# Altium PCB EthernetSwitchBoard.PcbDoc (part 1 of 2)
Units mil, origin at the board's own origin, x right, y up, seen from the top; angles counter-clockwise.
Board outline 5250 x 2500 mil, 4 copper layers (Top Layer, Ground Plane, Power Plane, Bottom Layer), stack 30.634 mil thick; 145 components, 168 nets, 574 pads, 171 vias.
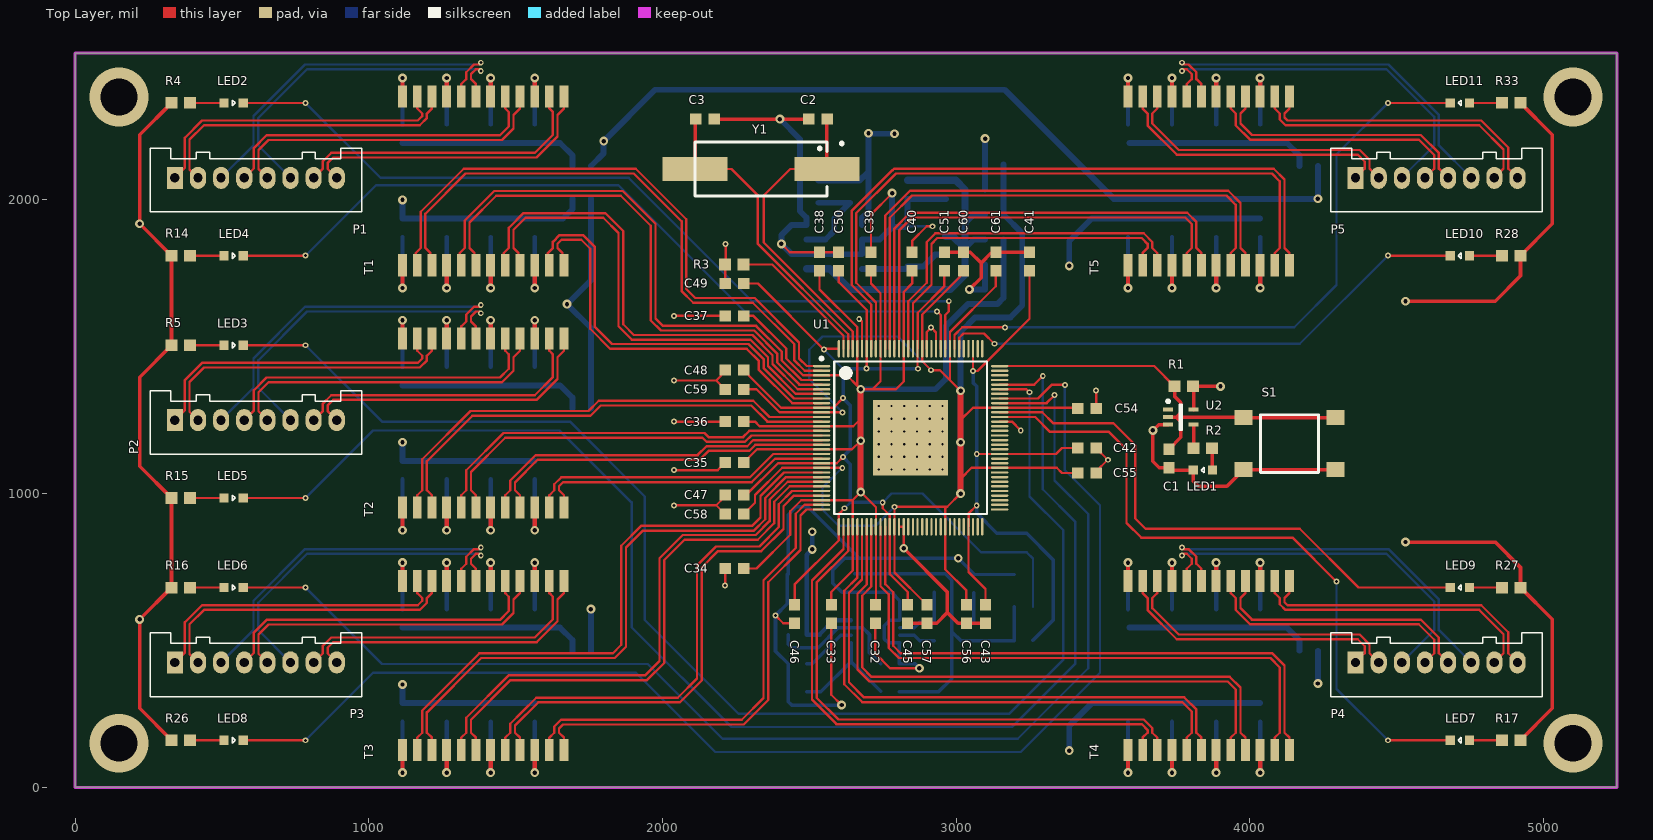
[diagram p0: Top Layer view]
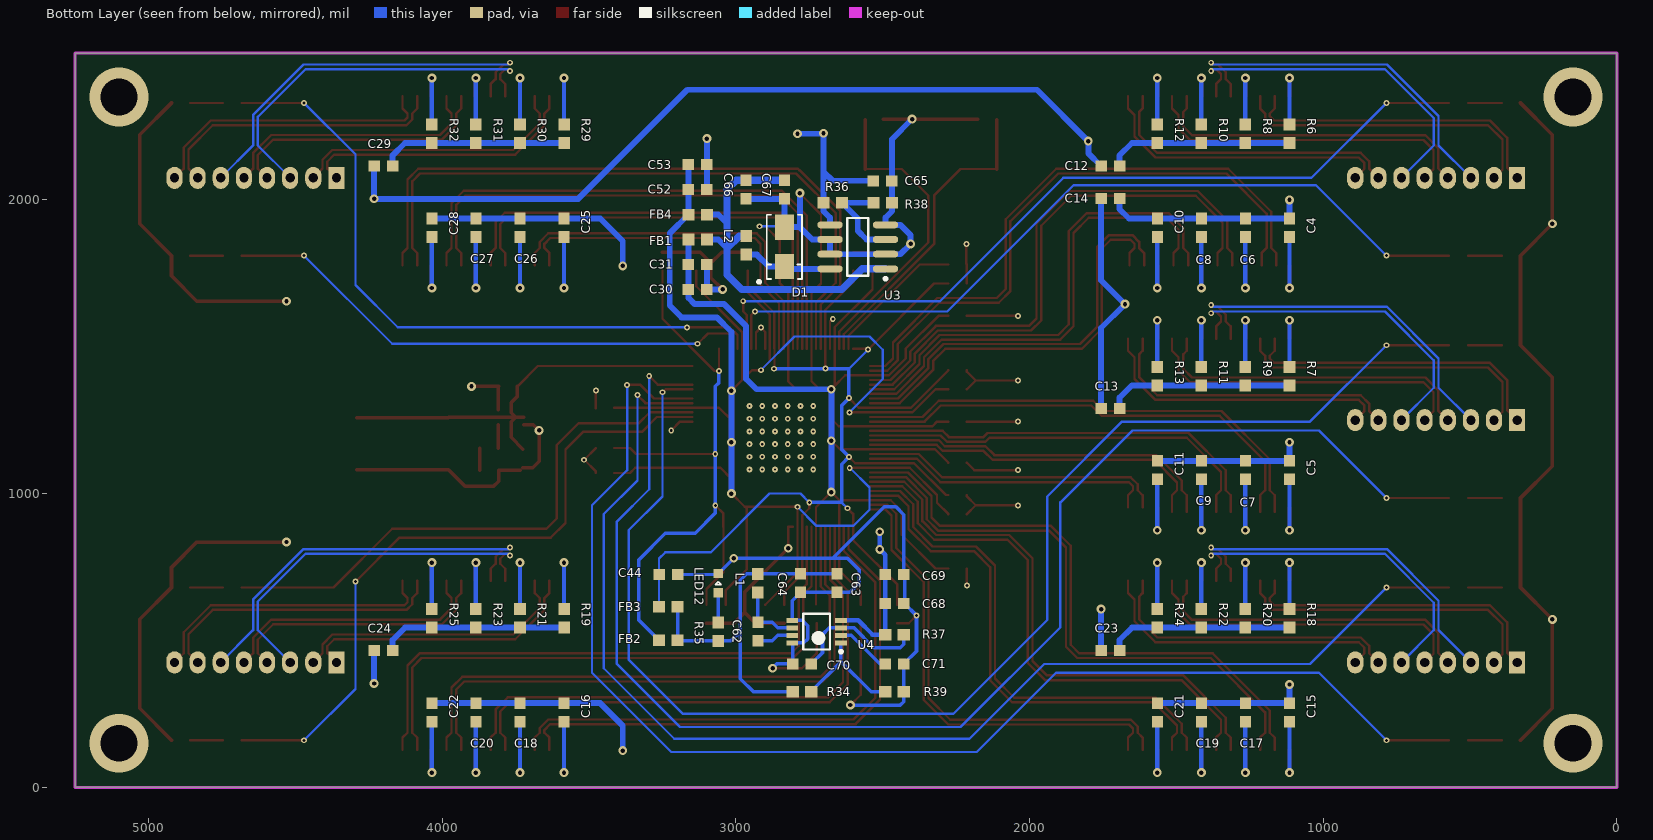
[diagram p1: Bottom Layer view, seen from below]
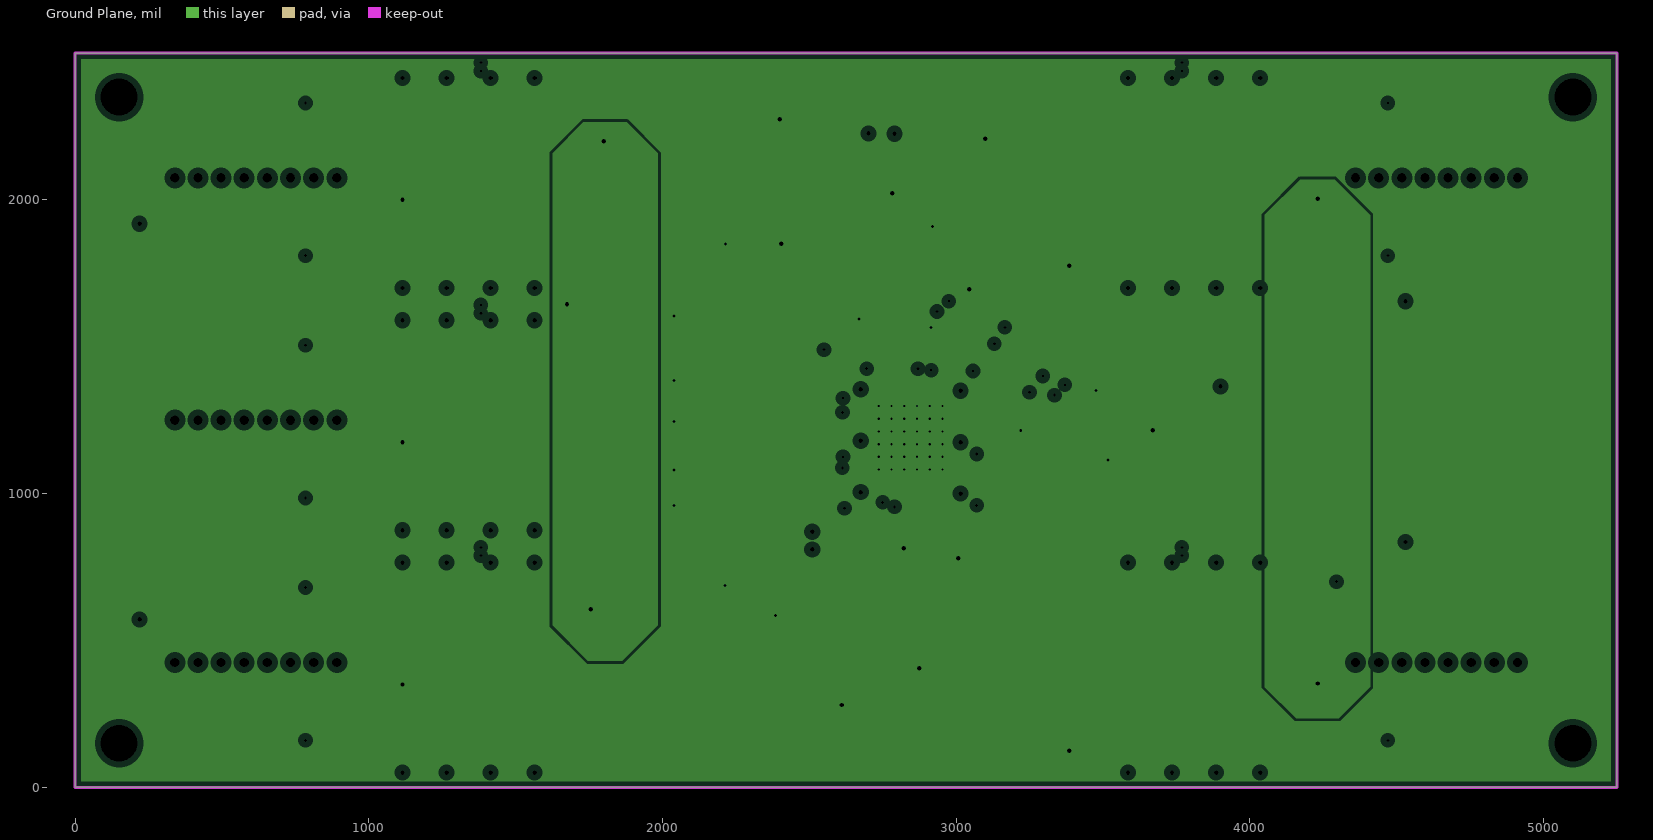
[diagram p2: Ground Plane, clearances drawn from the general rule]
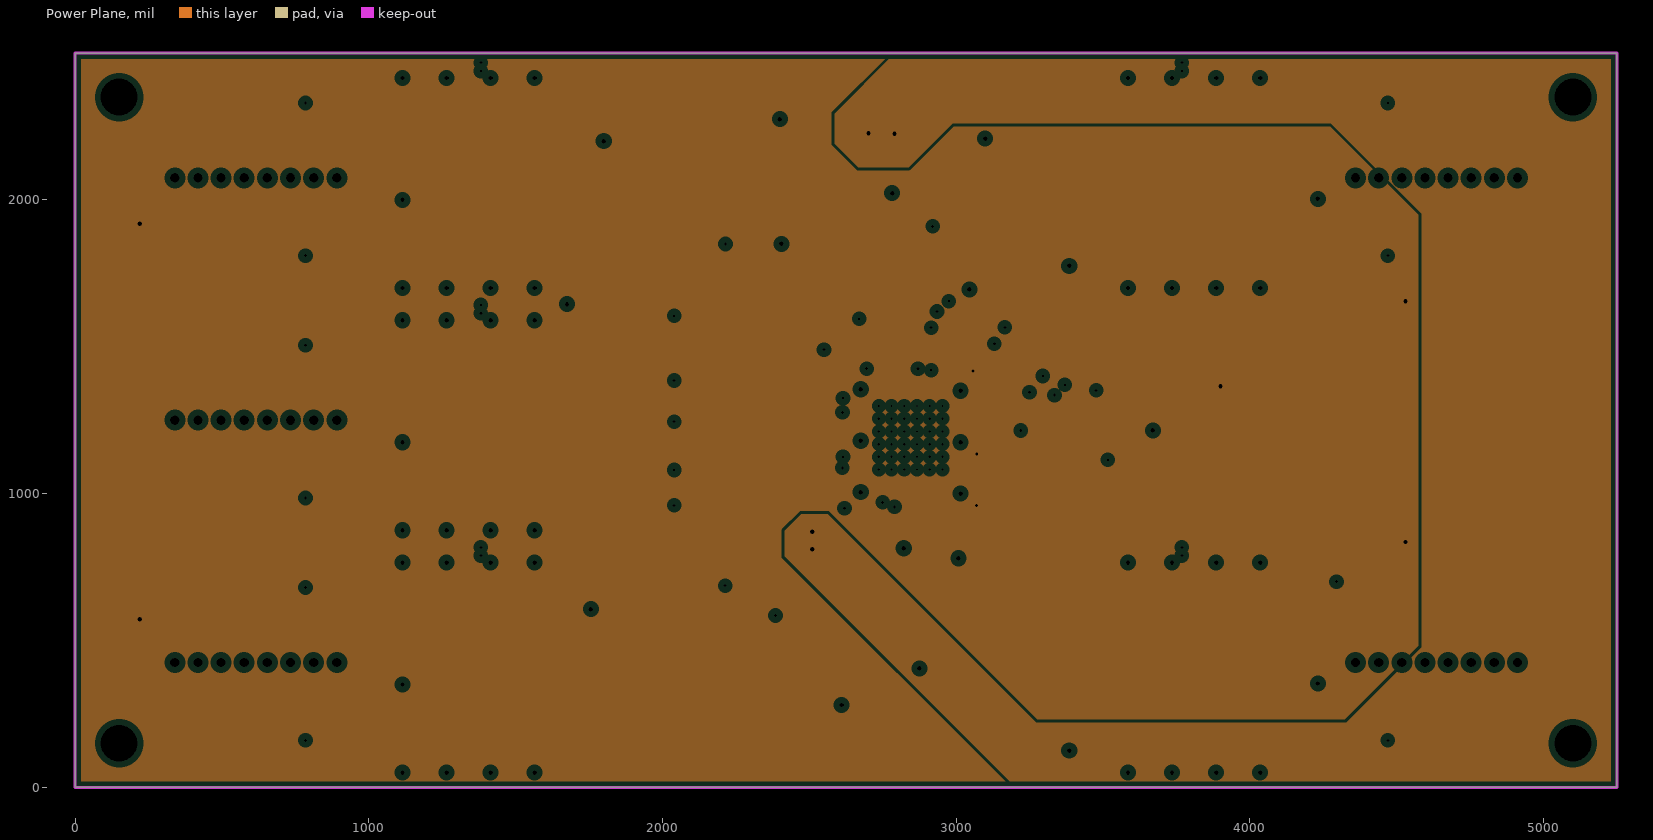
[diagram p3: Power Plane, clearances drawn from the general rule]

## Layer stack, top to bottom
Top Solder: solder mask 0.4, Solder Resist, Dk 3.5
Top Layer: signal copper 1.4
Dielectric 1: core 10, FR-4, Dk 4.2
Ground Plane: plane copper 1.417, net (Multiple Nets)
Dielectric 3: prepreg 5, Dk 4.2
Power Plane: plane copper 1.417, net VDDIO 2V5
Dielectric 2: core 10, Dk 4.2
Bottom Layer: signal copper 1.4
Bottom Solder: solder mask 0.4, Solder Resist, Dk 3.5

## Board outline
0,0 0,2500 5250,2500 5250,0

## Design rules (kind name [scope] priority, off if disabled: settings)
Clearance [All] p1: gap=7
DiffPairsRouting [All] p1: maxlimit=10 minlimit=8 mostfreqgap=8 toplayer_minwidth=8 toplayer_maxwidth=15 toplayer_prefwidth=8 bottomlayer_minwidth=8 bottomlayer_maxwidth=15 bottomlayer_prefwidth=8 maxuncoupledlength=500
HoleSize [All] p1: absolutevalues=TRUE maxlimit=150 minlimit=1 maxpercent=80.000 minpercent=20.000
PlaneClearance GNDPadPlaneClearance [InComponent('U1')] p1: clearance=10
PlaneClearance [All] p2: clearance=20
PlaneConnect GNDPadPlaneConnect [InComponent('U1')] p1: planeconnectstyle=Relief reliefexpansion=8 reliefentries=4 reliefconductorwidth=10 reliefairgap=8
PlaneConnect [All] p2: planeconnectstyle=Relief reliefexpansion=20 reliefentries=4 reliefconductorwidth=10 reliefairgap=10
PolygonConnect [All] p1: connectstyle=Relief reliefconductorwidth=10 reliefentries=4 polygonreliefangle="90 Angle" airgapwidth=10
RoutingVias [All] p1: holewidth=10 width=20 viastyle="Through Hole" minholewidth=10 minwidth=20 maxholewidth=28 maxwidth=50
SolderMaskExpansion [All] p1: expansion=4
Width [All] p1: maxlimit=30 minlimit=7 preferedwidth=10
26 further rules are at their usual default settings.

## Classes and differential pairs
component class SwitchPower: C30 C31 C32 C33 C34 C35 C36 C37 C38 C39 C40 C41 C42 C43 C44 C45 C46 C47 C48 C49 C50 C51 C52 C53 C54 C55 C56 C57 C58 C59 C60 C61 C62 C63 C64 C65 C66 C67 C68 C69 C70 C71 D1 FB1 FB2 FB3 FB4 L1 L2 LED12 R34 R35 R36 R37 R38 R39 U3 U4
component class SwitchConnectors: C4 C5 C6 C7 C8 C9 C10 C11 C12 C13 C14 C15 C16 C17 C18 C19 C20 C21 C22 C23 C24 C25 C26 C27 C28 C29 LED2 LED3 LED4 LED5 LED6 LED7 LED8 LED9 LED10 LED11 P1 P2 P3 P4 P5 R4 R5 R6 R7 R8 R9 R10 R11 R12 R13 R14 R15 R16 R17 R18 R19 R20 R21 R22 R23 R24 R25 R26 R27 R28 R29 R30 R31 R32 R33 T1 T2 T3 T4 T5
component class EthernetSwitchBoard: C1 C2 C3 LED1 R1 R2 R3 S1 U1 U2 Y1
differential pair 5O: +5O_P -5O_N
differential pair 5G: +5G_P -5G_N
differential pair 5B: +5B_P -5B_N
differential pair 5BR: +5BR_P -5BR_N
differential pair 4O: +4O_P -4O_N
differential pair 4G: +4G_P -4G_N
differential pair 4B: +4B_P -4B_N
differential pair 4BR: +4BR_P -4BR_N
differential pair 3O: +3O_P -3O_N
differential pair 3G: +3G_P -3G_N
differential pair 3B: +3B_P -3B_N
differential pair 3BR: +3BR_P -3BR_N
differential pair 2O: +2O_P -2O_N
differential pair 2G: +2G_P -2G_N
differential pair 2B: +2B_P -2B_N
differential pair 2BR: +2BR_P -2BR_N
differential pair 1O: +1O_P -1O_N
differential pair 1G: +1G_P -1G_N
differential pair 1B: +1B_P -1B_N
differential pair 1BR: +1BR_P -1BR_N
differential pair P1_TXRXA: +P1_TXRXA_P -P1_TXRXA_N
differential pair P1_TXRXB: +P1_TXRXB_P -P1_TXRXB_N
differential pair P1_TXRXC: +P1_TXRXC_P -P1_TXRXC_N
differential pair P1_TXRXD: +P1_TXRXD_P -P1_TXRXD_N
differential pair P2_TXRXA: +P2_TXRXA_P -P2_TXRXA_N
differential pair P2_TXRXB: +P2_TXRXB_P -P2_TXRXB_N
differential pair P2_TXRXC: +P2_TXRXC_P -P2_TXRXC_N
differential pair P2_TXRXD: +P2_TXRXD_P -P2_TXRXD_N
differential pair P3_TXRXA: +P3_TXRXA_P -P3_TXRXA_N
differential pair P3_TXRXB: +P3_TXRXB_P -P3_TXRXB_N
differential pair P3_TXRXC: +P3_TXRXC_P -P3_TXRXC_N
differential pair P3_TXRXD: +P3_TXRXD_P -P3_TXRXD_N
differential pair P4_TXRXA: +P4_TXRXA_P -P4_TXRXA_N
differential pair P4_TXRXB: +P4_TXRXB_P -P4_TXRXB_N
differential pair P4_TXRXC: +P4_TXRXC_P -P4_TXRXC_N
differential pair P4_TXRXD: +P4_TXRXD_P -P4_TXRXD_N
differential pair P5_TXRXA: +P5_TXRXA_P -P5_TXRXA_N
differential pair P5_TXRXB: +P5_TXRXB_P -P5_TXRXB_N
differential pair P5_TXRXC: +P5_TXRXC_P -P5_TXRXC_N
differential pair P5_TXRXD: +P5_TXRXD_P -P5_TXRXD_N

## Components (designator, comment, footprint, x,y, rotation, side; value= is the part's Value field where it differs from the comment)
C1 "Cap" CAPC0603 3725,1120 r270 top
C2 "Cap" CAPC0603 2530,2275 r180 top
C3 "Cap" CAPC0603 2145,2275 r0 top
C4 "Cap" CAPC0603 1115,1905 r270 bottom
C5 "Cap" CAPC0603 1115,1080 r270 bottom
C6 "Cap" CAPC0603 1265,1905 r270 bottom
C7 "Cap" CAPC0603 1265,1080 r270 bottom
C8 "Cap" CAPC0603 1415,1905 r270 bottom
C9 "Cap" CAPC0603 1415,1080 r270 bottom
C10 "Cap" CAPC0603 1565,1905 r270 bottom
C11 "Cap" CAPC0603 1565,1080 r270 bottom
C12 "Cap" CAPC0603 1725,2115 r180 bottom
C13 "Cap" CAPC0603 1725,1290 r180 bottom
C14 "Cap" CAPC0603 1725,2005 r0 bottom
C15 "Cap" CAPC0603 1115,255 r270 bottom
C16 "Cap" CAPC0603 3585,255 r270 bottom
C17 "Cap" CAPC0603 1265,255 r270 bottom
C18 "Cap" CAPC0603 3735,255 r270 bottom
C19 "Cap" CAPC0603 1415,255 r270 bottom
C20 "Cap" CAPC0603 3885,255 r270 bottom
C21 "Cap" CAPC0603 1565,255 r270 bottom
C22 "Cap" CAPC0603 4035,255 r270 bottom
C23 "Cap" CAPC0603 1725,465 r180 bottom
C24 "Cap" CAPC0603 4200,465 r180 bottom
C25 "Cap" CAPC0603 3585,1905 r270 bottom
C26 "Cap" CAPC0603 3735,1905 r270 bottom
C27 "Cap" CAPC0603 3885,1905 r270 bottom
C28 "Cap" CAPC0603 4035,1905 r270 bottom
C29 "Cap" CAPC0603 4200,2115 r180 bottom
C30 "Cap" CAPC0603 3130,1695 r180 bottom
C31 "Cap" CAPC0603 3130,1780 r180 bottom
C32 "Cap" CAPC0603 2725,590 r270 top
C33 "Cap" CAPC0603 2575,590 r270 top
C34 "Cap" CAPC0603 2245,745 r180 top
C35 "Cap" CAPC0603 2245,1105 r180 top
C36 "Cap" CAPC0603 2245,1245 r180 top
C37 "Cap" CAPC0603 2245,1605 r180 top
C38 "Cap" CAPC0603 2535,1790 r90 top
C39 "Cap" CAPC0603 2710,1790 r90 top
C40 "Cap" CAPC0603 2850,1790 r90 top
C41 "Cap" CAPC0603 3250,1790 r90 top
C42 "Cap" CAPC0603 3445,1155 r0 top
C43 "Cap" CAPC0603 3100,590 r270 top
C44 "Cap" CAPC0603 3230,725 r180 bottom
C45 "Cap" CAPC0603 2835,590 r270 top
C46 "Cap" CAPC0603 2450,590 r270 top
C47 "Cap" CAPC0603 2245,995 r180 top
C48 "Cap" CAPC0603 2245,1420 r180 top
C49 "Cap" CAPC0603 2245,1715 r180 top
C50 "Cap" CAPC0603 2600,1790 r90 top
C51 "Cap" CAPC0603 2960,1790 r90 top
C52 "Cap" CAPC0603 3130,2035 r180 bottom
C53 "Cap" CAPC0603 3130,2120 r180 bottom
C54 "Cap" CAPC0603 3445,1290 r0 top
C55 "Cap" CAPC0603 3445,1070 r0 top
C56 "Cap" CAPC0603 3035,590 r270 top
C57 "Cap" CAPC0603 2900,590 r270 top
C58 "Cap" CAPC0603 2245,930 r180 top
C59 "Cap" CAPC0603 2245,1355 r180 top
C60 "Cap" CAPC0603 3025,1790 r90 top
C61 "Cap" CAPC0603 3135,1790 r90 top
C62 "Cap" CAPC0603 2925,530 r90 bottom
C63 "Cap" CAPC0603 2655,695 r270 bottom
C64 "Cap" CAPC0603 2780,695 r270 bottom
C65 "Cap" CAPC0603 2500,2065 r180 bottom
C66 "Cap" CAPC0603 2965,2035 r270 bottom
C67 "Cap" CAPC0603 2835,2035 r270 bottom
C68 "Cap" CAPC0603 2460,625 r180 bottom
C69 "Cap" CAPC0603 2460,725 r180 bottom
C70 "Cap" CAPC0603 2775,420 r0 bottom
C71 "Cap" CAPC0603 2460,420 r180 bottom
D1 "Zener" SMASeries 2835,1840 r90 bottom
FB1 "FBead" RES0603 3130,1865 r0 bottom
FB2 "FBead" RES0603 3230,500 r180 bottom
FB3 "FBead" RES0603 3230,615 r0 bottom
FB4 "FBead" RES0603 3130,1950 r0 bottom
L1 "Inductor" RES0603 2925,695 r90 bottom
L2 "Inductor" RES0603 2965,1845 r90 bottom
LED1 "LED" LED0603 3840,1080 r180 top
LED2 "LED" LED0603 540,2330 r0 top
LED3 "LED" LED0603 540,1505 r0 top
LED4 "LED" LED0603 540,1810 r0 top
LED5 "LED" LED0603 540,985 r0 top
LED6 "LED" LED0603 540,680 r0 top
LED7 "LED" LED0603 4715,160 r180 top
LED8 "LED" LED0603 540,160 r0 top
LED9 "LED" LED0603 4715,680 r180 top
LED10 "LED" LED0603 4715,1810 r180 top
LED11 "LED" LED0603 4715,2330 r180 top
LED12 "LED" LED0603 3060,695 r90 bottom
P1 "MOLEX-HDR-1x8-SHERLOCK_VERT" MOLEX-HDR-1X8-SHERLOCK-VERT 340,2075 r180 top
P2 "MOLEX-HDR-1x8-SHERLOCK_VERT" MOLEX-HDR-1X8-SHERLOCK-VERT 340,1250 r180 top
P3 "MOLEX-HDR-1x8-SHERLOCK_VERT" MOLEX-HDR-1X8-SHERLOCK-VERT 340,425 r180 top
P4 "MOLEX-HDR-1x8-SHERLOCK_VERT" MOLEX-HDR-1X8-SHERLOCK-VERT 4360,425 r180 top
P5 "MOLEX-HDR-1x8-SHERLOCK_VERT" MOLEX-HDR-1X8-SHERLOCK-VERT 4360,2075 r180 top
R1 "Res" RES0603 3775,1365 r0 top
R2 "Res" RES0603 3840,1155 r0 top
R3 "Res" RES0603 2245,1780 r0 top
R4 "Res" RES0603 360,2330 r0 top
R5 "Res" RES0603 360,1505 r0 top
R6 "Res" RES0603 1115,2225 r270 bottom
R7 "Res" RES0603 1115,1400 r270 bottom
R8 "Res" RES0603 1265,2225 r270 bottom
R9 "Res" RES0603 1265,1400 r270 bottom
R10 "Res" RES0603 1415,2225 r270 bottom
R11 "Res" RES0603 1415,1400 r270 bottom
R12 "Res" RES0603 1565,2225 r270 bottom
R13 "Res" RES0603 1565,1400 r270 bottom
R14 "Res" RES0603 360,1810 r0 top
R15 "Res" RES0603 360,985 r0 top
R16 "Res" RES0603 360,680 r0 top
R17 "Res" RES0603 4890,160 r180 top
R18 "Res" RES0603 1115,575 r270 bottom
R19 "Res" RES0603 3585,575 r270 bottom
R20 "Res" RES0603 1265,575 r270 bottom
R21 "Res" RES0603 3735,575 r270 bottom
R22 "Res" RES0603 1415,575 r270 bottom
R23 "Res" RES0603 3885,575 r270 bottom
R24 "Res" RES0603 1565,575 r270 bottom
R25 "Res" RES0603 4035,575 r270 bottom
R26 "Res" RES0603 360,160 r0 top
R27 "Res" RES0603 4890,680 r180 top
R28 "Res" RES0603 4890,1810 r180 top
R29 "Res" RES0603 3585,2225 r270 bottom
R30 "Res" RES0603 3735,2225 r270 bottom
R31 "Res" RES0603 3885,2225 r270 bottom
R32 "Res" RES0603 4035,2225 r270 bottom
R33 "Res" RES0603 4890,2330 r180 top
R34 "Res" RES0603 2775,325 r0 bottom
R35 "Res" RES0603 3060,530 r90 bottom
R36 "Res" RES0603 2670,1990 r0 bottom
R37 "Res" RES0603 2460,520 r0 bottom
R38 "Res" RES0603 2500,1990 r0 bottom
R39 "Res" RES0603 2460,325 r180 bottom
S1 "Button" PTS645xxxxSMTR92 4135,1170 r180 top
T1 "749023010A Transformer LAN 10/100/1000 Base-T" 749023010A 1390,2065 r90 top
T2 "749023010A Transformer LAN 10/100/1000 Base-T" 749023010A 1390,1240 r90 top
T3 "749023010A Transformer LAN 10/100/1000 Base-T" 749023010A 1390,415 r90 top
T4 "749023010A Transformer LAN 10/100/1000 Base-T" 749023010A 3860,415 r90 top
T5 "749023010A Transformer LAN 10/100/1000 Base-T" 749023010A 3860,2065 r90 top
U1 "KSZ9897" 128-TQFP 2845,1190 r0 top
U2 "74LVC1G14GW,125" SOT35-5pin 3765,1260 r0 top
U3 "MIC4682YM" 8-SOIC 2585,1840 r0 bottom
U4 "MCP16311T-E/MS" TSSOP-8 2725,530 r0 bottom
Y1 "25MHz" HC49/US 2335.59,2105 r180 top

## Footprints (in the part's own frame and the unit in brackets; to place one, negate y for a bottom-side part, rotate by r counter-clockwise, add the part's x,y. Pads: shape width x height; smd on the part's side, far side on the other; paste and mask are expansions set on the pad)
8-SOIC [mm] "Used for LMH6612"
  oval 2.2x0.6 smd: 1(-2.4,1.905) 2(-2.4,0.635) 3(-2.4,-0.635) 4(-2.4,-1.905) 5(2.4,-1.905) 6(2.4,-0.635) 7(2.4,0.635) 8(2.4,1.905)
  silkscreen extent -2.52,-2.5 0.9,2.88, body extent -2,-2.5 2,2.5, height 1.75
128-TQFP [mm] "TSQFP, 128-Leads, Body 14.00x14.00mm, Pitch 0.40mm, Thermal Pad 6.50x6.50mm, IPC Medium Density"
  oval 1.5x0.204 smd: 1(-7.7,6.2) 2(-7.7,5.8) 3(-7.7,5.4) 4(-7.7,5) 5(-7.7,4.6) 6(-7.7,4.2) 7(-7.7,3.8) 8(-7.7,3.4) 9(-7.7,3) 10(-7.7,2.6) 11(-7.7,2.2) 12(-7.7,1.8) 13(-7.7,1.4) 14(-7.7,1) 15(-7.7,0.6) 16(-7.7,0.2) 17(-7.7,-0.2) 18(-7.7,-0.6) 19(-7.7,-1) 20(-7.7,-1.4) 21(-7.7,-1.8) 22(-7.7,-2.2) 23(-7.7,-2.6) 24(-7.7,-3) 25(-7.7,-3.4) 26(-7.7,-3.8) 27(-7.7,-4.2) 28(-7.7,-4.6) 29(-7.7,-5) 30(-7.7,-5.4) 31(-7.7,-5.8) 32(-7.7,-6.2) 65(7.7,-6.2) 66(7.7,-5.8) 67(7.7,-5.4) 68(7.7,-5) 69(7.7,-4.6) 70(7.7,-4.2) 71(7.7,-3.8) 72(7.7,-3.4) 73(7.7,-3) 74(7.7,-2.6) 75(7.7,-2.2) 76(7.7,-1.8) 77(7.7,-1.4) 78(7.7,-1) 79(7.7,-0.6) 80(7.7,-0.2) 81(7.7,0.2) 82(7.7,0.6) 83(7.7,1) 84(7.7,1.4) 85(7.7,1.8) 86(7.7,2.2) 87(7.7,2.6) 88(7.7,3) 89(7.7,3.4) 90(7.7,3.8) 91(7.7,4.2) 92(7.7,4.6) 93(7.7,5) 94(7.7,5.4) 95(7.7,5.8) 96(7.7,6.2)
  oval 0.204x1.5 smd: 33(-6.2,-7.7) 34(-5.8,-7.7) 35(-5.4,-7.7) 36(-5,-7.7) 37(-4.6,-7.7) 38(-4.2,-7.7) 39(-3.8,-7.7) 40(-3.4,-7.7) 41(-3,-7.7) 42(-2.6,-7.7) 43(-2.2,-7.7) 44(-1.8,-7.7) 45(-1.4,-7.7) 46(-1,-7.7) 47(-0.6,-7.7) 48(-0.2,-7.7) 49(0.2,-7.7) 50(0.6,-7.7) 51(1,-7.7) 52(1.4,-7.7) 53(1.8,-7.7) 54(2.2,-7.7) 55(2.6,-7.7) 56(3,-7.7) 57(3.4,-7.7) 58(3.8,-7.7) 59(4.2,-7.7) 60(4.6,-7.7) 61(5,-7.7) 62(5.4,-7.7) 63(5.8,-7.7) 64(6.2,-7.7) 97(6.2,7.7) 98(5.8,7.7) 99(5.4,7.7) 100(5,7.7) 101(4.6,7.7) 102(4.2,7.7) 103(3.8,7.7) 104(3.4,7.7) 105(3,7.7) 106(2.6,7.7) 107(2.2,7.7) 108(1.8,7.7) 109(1.4,7.7) 110(1,7.7) 111(0.6,7.7) 112(0.2,7.7) 113(-0.2,7.7) 114(-0.6,7.7) 115(-1,7.7) 116(-1.4,7.7) 117(-1.8,7.7) 118(-2.2,7.7) 119(-2.6,7.7) 120(-3,7.7) 121(-3.4,7.7) 122(-3.8,7.7) 123(-4.2,7.7) 124(-4.6,7.7) 125(-5,7.7) 126(-5.4,7.7) 127(-5.8,7.7) 128(-6.2,7.7)
  rect 6.5x6.5 smd: 129(0,0)
  silkscreen extent -7.82,-6.6 6.6,6.98, body extent -7,-7 7,7, height 1
749023010A [mm] "TRANSFORMER LAN 10/100/1000 SMD"
  rect 1.91x0.76 smd: 1(-7.305,6.985) 2(-7.305,5.715) 3(-7.305,4.445) 4(-7.305,3.175) 5(-7.305,1.905) 6(-7.305,0.635) 7(-7.305,-0.635) 8(-7.305,-1.905) 9(-7.305,-3.175) 10(-7.305,-4.445) 11(-7.305,-5.715) 12(-7.305,-6.985) 13(7.305,-6.985) 14(7.305,-5.715) 15(7.305,-4.445) 16(7.305,-3.175) 17(7.305,-1.905) 18(7.305,-0.635) 19(7.305,0.635) 20(7.305,1.905) 21(7.305,3.175) 22(7.305,4.445) 23(7.305,5.715) 24(7.305,6.985)
  body extent -7.62,-8.75 7.62,8.75, height 6.1
CAPC0603 [mm] "Chip Capacitor, 2-Leads, Body 1.60x0.80mm, IPC Medium Density"
  rect 1x0.95 smd: 1(-0.8,0) 2(0.8,0)
  body extent -0.88,-0.48 0.87,0.48, height 0.8
HC49/US [mm]
  rect 5.6x2.1 smd: 1(-5.7,0) 2(5.7,0)
  silkscreen extent -7.11,-2.35 5.7,2.35, body extent -6.35,-2.35 6.35,2.35, height 3.16
LED0603 [mm] "Chip LED, 2-Leads, Body 1.60x0.80mm, IPC Medium Density"
  rect 0.8x0.8 smd: A(-0.825,0) C(0.825,0)
  silkscreen extent -0.13,-0.25 0.12,0.25, body extent -0.88,-0.48 0.87,0.47, height 0.8
MOLEX-HDR-1X8-SHERLOCK-VERT [mm] "8 Positions Header Connector 0.079\" (2.00mm) Through Hole Tin"
  rect 1.397x1.905 hole 0.8: 1(0,0)
  oval 1.397x1.905 hole 0.8: 2(-2,0) 3(-4,0) 4(-6,0) 5(-8,0) 6(-10,0) 7(-12,0) 8(-14,0)
  silkscreen extent -16.15,-2.55 2.15,2.95, body extent -16.14,-2.57 2.16,2.98, height 9.25
PTS645xxxxSMTR92 [mm] "PTS645 Series SMT 6 mm Tactile Switch"
  rect 1.555x1.3 smd: A(-3.975,2.25) A(3.975,2.25) B(-3.975,-2.25) B(3.975,-2.25)
  silkscreen extent -2.5,-2.5 2.5,2.5, body extent -3,-3 3,3, height 4.5
RES0603 [mm] "Chip Resistor, 2-Leads, Body 1.60x0.80mm, IPC Medium Density"
  rect 1.05x1 smd: 1(-0.8,0) 2(0.8,0)
  body extent -0.88,-0.48 0.87,0.47, height 0.8
SMASeries [mil]
  rect 86x65 smd: A(67,0) C(-67,0)
  silkscreen extent -124,-60 109,91, body extent -104,-55 104,55, height 92
SOT35-5pin [mm] "For 296-38736-1-ND"
  rect 0.85x0.35 smd: 1(-1.1,0.65) 2(-1.1,0) 3(-1.1,-0.65) 4(1.1,-0.65) 5(1.1,0.65)
  silkscreen extent -1.22,-1.1 0.1,1.5, body extent -0.7,-1.07 0.7,1.08, height 1.1
TSSOP-8 [mm] "TSOP, 8-Leads, Body 3.00x3.00mm, Pitch 0.65mm, IPC Medium Density"
  rect 1.016x0.42 smd: 1(-2.105,0.975) 2(-2.105,0.325) 3(-2.105,-0.325) 4(-2.105,-0.975) 5(2.105,-0.975) 6(2.105,-0.325) 7(2.105,0.325) 8(2.105,0.975)
  silkscreen extent -2.23,-1.55 1.15,1.86, body extent -1.55,-1.55 1.55,1.55, height 1.1

## Part data
C2 C3: "CAP CER 39PF 100V C0G/NP0 0603"
D1: "Zener Diode"
FB1 FB2 FB3 FB4: "Ferrite Bead"
P1 P2 P3 P4 P5: "CONN HEADER 8POS 2MM VERT TIN"
S1: "SPST Button"
T1 T2 T3 T4 T5: "TRANSFORMER LAN 10/100/1000 SMD"
U1: library part KSZ9897RTXC-TR, "Ethernet Switch 10/100/1000 Base-T PHY I²C, SPI Interface 128-TQFP (14x14)"
U2: "IC SCHMITT-TRIG INV 5TSSOP"
U3: "IC REG BUCK ADJ 2A 8SOIC"
U4: "IC REG BUCK ADJ 1A SYNC 8MSOP"
Y1: library part ABLS-25.000MHZ-B4-F-T, "25MHz ±30ppm Crystal 18pF 40 Ohm -20°C ~ 70°C Surface Mount HC49/US"

## Via types
v1: diameter 30, hole 15, Top Layer to Bottom Layer, 75 vias
v2: diameter 20, hole 10, Top Layer to Bottom Layer, 56 vias
v3: diameter 19.68, hole 7.87, Top Layer to Bottom Layer, 36 vias
v4: diameter 200, hole 125, Top Layer to Bottom Layer, 4 vias

## Nets (pads, with @x,y where several pads share a name; then routed paths per layer and width w, separated by ;. In a path a pad name is that pad's centre, name@x,y a point inside that pad or via, vN(x,y) a via of type N, cw(c..) or ccw(c..) an arc to the next point about the centre after c; other vN are vias at no path point)
1B_N: P1.5 T1.16 | length 1124.1
  Top Layer w8: P1.5@654.96,2075 625,2104.96 625,2170 659,2204 1453.63,2204 1493,2243.37 1493,2289 1515,2311 T1.16@1515,2352.6
1B_P: P1.4 T1.17 | length 1121.2
  Top Layer w8: P1.4@576.22,2075 609,2107.78 609,2176.63 652.37,2220 1447,2220 1477,2250 1477,2299 1465,2311 T1.17@1465,2352.6
1BR_N: P1.8 T1.13 | length 1029.7
  Top Layer w8: P1.8@891.18,2075 860,2106.18 860,2125 879,2144 1571.63,2144 1643,2215.37 1643,2289 1665,2311 T1.13@1665,2352.6
1BR_P: P1.7 T1.14 | length 1025.7
  Top Layer w8: P1.7@812.44,2075 844,2106.56 844,2131.63 872.37,2160 1565,2160 1627,2222 1627,2299 1615,2311 T1.14@1615,2352.6
1G_N: P1.6 T1.19 | length 1204.2
  Top Layer w8: T1.19@1365,2352.6 1365,2394.2 1348,2411.2 1348,2428 1365,2445 1375.63,2445 v2(1381.63,2439)
  Bottom Layer w8: P1.6@733.7,2075 623.59,2185.11 623.59,2278.59 790,2445 1375.63,2445 v2(1381.63,2439)
1G_P: P1.3 T1.20 | length 1257.3
  Top Layer w8: T1.20@1315,2352.6 1315,2394.2 1332,2411.2 1332,2434.63 1358.37,2461 1375.63,2461 v2(1381.63,2467)
  Bottom Layer w8: P1.3@497.48,2075 607.59,2185.11 607.59,2285.22 783.37,2461 1375.63,2461 v2(1381.63,2467)
1O_N: P1.2 T1.22 | length 1061.6
  Top Layer w8: P1.2@418.74,2075 390,2103.74 390,2205 439,2254 1173.63,2254 1198,2278.37 1198,2294 1215,2311 T1.22@1215,2352.6
1O_P: P1.1 T1.23 | length 1063.7
  Top Layer w8: P1.1@340,2075 374,2109 374,2211.63 432.37,2270 1167,2270 1182,2285 1182,2294 1165,2311 T1.23@1165,2352.6
1V2_FB: C66.1 C67.1 FB1.1 FB4.1 L2.2 U3.1 | length 1331.3
  Bottom Layer w20: 3030,1835 3060,1865 FB1.1@3098.5,1865 ; 3030,1920 3060,1950 FB4.1@3098.5,1950
  Bottom Layer w25: U3.1@2490.51,1765 2570,1765 2640,1695 2980,1695 3030,1745 3030,1835 ; C67.1@2835,2066.5 C66.1@2965,2066.5 2998.5,2066.5 3030,2035 3030,1920 3030,1835 ; L2.2@2965,1876.5 2988.5,1876.5 3030,1835
1V2_SW: D1.C L2.1 U3.8 | length 294.3
  Bottom Layer w20: U3.8@2679.49,1765 D1.C@2827,1765 ; D1.C@2835,1773 2888,1773 2928.5,1813.5 L2.1@2965,1813.5
2B_N: P2.5 T2.16 | length 1124.1
  Top Layer w8: P2.5@654.96,1250 625,1279.96 625,1345 659,1379 1453.63,1379 1493,1418.37 1493,1464 1515,1486 T2.16@1515,1527.6
2B_P: P2.4 T2.17 | length 1121.2
  Top Layer w8: P2.4@576.22,1250 609,1282.78 609,1351.63 652.37,1395 1447,1395 1477,1425 1477,1474 1465,1486 T2.17@1465,1527.6
2BR_N: P2.8 T2.13 | length 1029.7
  Top Layer w8: P2.8@891.18,1250 860,1281.18 860,1300 879,1319 1571.63,1319 1643,1390.37 1643,1464 1665,1486 T2.13@1665,1527.6
2BR_P: P2.7 T2.14 | length 1025.7
  Top Layer w8: P2.7@812.44,1250 844,1281.56 844,1306.63 872.37,1335 1565,1335 1627,1397 1627,1474 1615,1486 T2.14@1615,1527.6
2G_N: P2.6 T2.19 | length 1204.2
  Top Layer w8: T2.19@1365,1527.6 1365,1569.2 1348,1586.2 1348,1603 1365,1620 1375.63,1620 v2(1381.63,1614)
  Bottom Layer w8: P2.6@733.7,1250 623.59,1360.11 623.59,1453.59 790,1620 1375.63,1620 v2(1381.63,1614)
2G_P: P2.3 T2.20 | length 1257.3
  Top Layer w8: T2.20@1315,1527.6 1315,1569.2 1332,1586.2 1332,1609.63 1358.37,1636 1375.63,1636 v2(1381.63,1642)
  Bottom Layer w8: P2.3@497.48,1250 607.59,1360.11 607.59,1460.22 783.37,1636 1375.63,1636 v2(1381.63,1642)
2O_N: P2.2 T2.22 | length 1061.6
  Top Layer w8: P2.2@418.74,1250 390,1278.74 390,1380 439,1429 1173.63,1429 1198,1453.37 1198,1469 1215,1486 T2.22@1215,1527.6
2O_P: P2.1 T2.23 | length 1063.7
  Top Layer w8: P2.1@340,1250 374,1284 374,1386.63 432.37,1445 1167,1445 1182,1460 1182,1469 1165,1486 T2.23@1165,1527.6
2V5: C63.1 C64.1 FB2.2 FB3.1 L1.2 R34.2 R35.1 | length 1213.2
  Bottom Layer w12: C63.1@2655,726.5 C64.1@2780,726.5 L1.2@2925,726.5 2963.5,726.5 2985,705 2985,370 2940,325 R34.2@2806.5,325 ; 2985,530 3016.5,498.5 R35.1@3060,498.5 3197.01,498.5 FB2.2@3198.5,500 FB3.1@3198.5,615
2V5_FB: R34.1 R39.1 U4.1 | length 400.3
  Bottom Layer w12: R39.1@2491.5,325 2539.21,325 2642.11,427.89 ; U4.1@2642.11,491.61 2642.11,427.89 ; R34.1@2743.5,326.5 2642.11,427.89
2V5_SW: C62.2 L1.1 U4.6 | length 226.9
  Bottom Layer w12: U4.6@2807.89,542.8 2857.8,542.8 2876.5,561.5 C62.2@2925,561.5 L1.1@2925,663.5
3B_N: P3.5 T3.16 | length 1124.1
  Top Layer w8: P3.5@654.96,425 625,454.96 625,520 659,554 1453.63,554 1493,593.37 1493,639 1515,661 T3.16@1515,702.6
3B_P: P3.4 T3.17 | length 1121.2
  Top Layer w8: P3.4@576.22,425 609,457.78 609,526.63 652.37,570 1447,570 1477,600 1477,649 1465,661 T3.17@1465,702.6
3BR_N: P3.8 T3.13 | length 1029.7
  Top Layer w8: P3.8@891.18,425 860,456.18 860,475 879,494 1571.63,494 1643,565.37 1643,639 1665,661 T3.13@1665,702.6
3BR_P: P3.7 T3.14 | length 1025.7
  Top Layer w8: P3.7@812.44,425 844,456.56 844,481.63 872.37,510 1565,510 1627,572 1627,649 1615,661 T3.14@1615,702.6
3G_N: P3.6 T3.19 | length 1204.2
  Top Layer w8: T3.19@1365,702.6 1365,744.2 1348,761.2 1348,778 1365,795 1375.63,795 v2(1381.63,789)
  Bottom Layer w8: P3.6@733.7,425 623.59,535.11 623.59,628.59 790,795 1375.63,795 v2(1381.63,789)
3G_P: P3.3 T3.20 | length 1257.3
  Top Layer w8: T3.20@1315,702.6 1315,744.2 1332,761.2 1332,784.63 1358.37,811 1375.63,811 v2(1381.63,817)
  Bottom Layer w8: P3.3@497.48,425 607.59,535.11 607.59,635.22 783.37,811 1375.63,811 v2(1381.63,817)
3O_N: P3.2 T3.22 | length 1061.6
  Top Layer w8: P3.2@418.74,425 390,453.74 390,555 439,604 1173.63,604 1198,628.37 1198,644 1215,661 T3.22@1215,702.6
3O_P: P3.1 T3.23 | length 1063.7
  Top Layer w8: P3.1@340,425 374,459 374,561.63 432.37,620 1167,620 1182,635 1182,644 1165,661 T3.23@1165,702.6
4B_N: P4.5 T4.16 | length 914.1
  Top Layer w8: T4.16@3985,702.6 3985,661 3968,644 3968,610 4007,571 4581.63,571 4643.59,509.04 4643.59,456.37 P4.5@4674.96,425
4B_P: P4.4 T4.17 | length 914.1
  Top Layer w8: T4.17@3935,702.6 3935,661 3952,644 3952,603.37 4000.37,555 4575,555 4627.59,502.41 4627.59,456.37 P4.4@4596.22,425
4BR_N: P4.8 T4.13 | length 999.6
  Top Layer w8: T4.13@4135,702.6 4135,661 4118,644 4118,630 4128,620 4787.63,620 4879.81,527.82 4879.81,456.37 P4.8@4911.18,425
4BR_P: P4.7 T4.14 | length 999.6
  Top Layer w8: T4.14@4085,702.6 4085,661 4102,644 4102,623.37 4121.37,604 4781,604 4863.81,521.19 4863.81,456.37 P4.7@4832.44,425
4G_N: P4.6 T4.19 | length 1360.7
  Top Layer w8: v2(3768.37,817) 3774.37,811 3791.63,811 3818,784.63 3818,761.2 3835,744.2 T4.19@3835,702.6
  Bottom Layer w8: v2(3768.37,817) 3774.37,811 4471.63,811 4643.59,639.04 4643.59,535.11 P4.6@4753.7,425
4G_P: P4.3 T4.20 | length 1307.7
  Top Layer w8: v2(3768.37,789) 3774.37,795 3785,795 3802,778 3802,761.2 3785,744.2 T4.20@3785,702.6
  Bottom Layer w8: v2(3768.37,789) 3774.37,795 4465,795 4627.59,632.41 4627.59,535.11 P4.3@4517.48,425
4O_N: P4.2 T4.22 | length 964.7
  Top Layer w8: T4.22@3685,702.6 3685,661 3668,644 3668,610 3758,520 4374,520 4407.37,486.63 4407.37,456.37 P4.2@4438.74,425
4O_P: P4.1 T4.23 | length 964.7
  Top Layer w8: T4.23@3635,702.6 3635,661 3652,644 3652,603.37 3751.37,504 4367.37,504 4391.37,480 4391.37,456.37 P4.1@4360,425
5B_N: P5.5 T5.16 | length 914.1
  Top Layer w8: T5.16@3985,2352.6 3985,2311 3968,2294 3968,2260 4007,2221 4581.63,2221 4643.59,2159.04 4643.59,2106.37 P5.5@4674.96,2075
5B_P: P5.4 T5.17 | length 914.1
  Top Layer w8: T5.17@3935,2352.6 3935,2311 3952,2294 3952,2253.37 4000.37,2205 4575,2205 4627.59,2152.41 4627.59,2106.37 P5.4@4596.22,2075
5BR_N: P5.8 T5.13 | length 999.6
  Top Layer w8: T5.13@4135,2352.6 4135,2311 4118,2294 4118,2280 4128,2270 4787.63,2270 4879.81,2177.82 4879.81,2106.37 P5.8@4911.18,2075
5BR_P: P5.7 T5.14 | length 999.6
  Top Layer w8: T5.14@4085,2352.6 4085,2311 4102,2294 4102,2273.37 4121.37,2254 4781,2254 4863.81,2171.19 4863.81,2106.37 P5.7@4832.44,2075
5G_N: P5.6 T5.19 | length 1360.7
  Top Layer w8: v2(3768.37,2467) 3774.37,2461 3791.63,2461 3818,2434.63 3818,2411.2 3835,2394.2 T5.19@3835,2352.6
  Bottom Layer w8: v2(3768.37,2467) 3774.37,2461 4471.63,2461 4643.59,2289.04 4643.59,2185.11 P5.6@4753.7,2075
5G_P: P5.3 T5.20 | length 1307.7
  Top Layer w8: v2(3768.37,2439) 3774.37,2445 3785,2445 3802,2428 3802,2411.2 3785,2394.2 T5.20@3785,2352.6
  Bottom Layer w8: v2(3768.37,2439) 3774.37,2445 4465,2445 4627.59,2282.41 4627.59,2185.11 P5.3@4517.48,2075
5O_N: P5.2 T5.22 | length 964.7
  Top Layer w8: T5.22@3685,2352.6 3685,2311 3668,2294 3668,2260 3758,2170 4374,2170 4407.37,2136.63 4407.37,2106.37 P5.2@4438.74,2075
5O_P: P5.1 T5.23 | length 964.7
  Top Layer w8: T5.23@3635,2352.6 3635,2311 3652,2294 3652,2253.37 3751.37,2154 4367.37,2154 4391.37,2130 4391.37,2106.37 P5.1@4360,2075
5V: C65.1 C68.1 C69.1 R36.2 R37.2 U3.5 U4.4 | length 1121.1
  Top Layer w20: v1(2701.5,2226.5) v1@2702.99,2225
  Bottom Layer w15: v1(2510,870) v1(2510,810) 2491.5,791.5 C69.1@2491.5,725 R37.2@2491.5,520 2535,520 2583.39,568.39 U4.4@2642.11,568.39
  Bottom Layer w20: C65.1@2531.5,2065 2670,2065 2701.5,2096.5 ; U3.5@2679.49,1915 2679.49,1939.49 2701.5,1961.5 R36.2@2701.5,1990 2701.5,2096.5 ; v1(2701.5,2226.5) 2701.5,2096.5 ; v1@2702.99,2225 v1(2790,2225)
AVDDL1V2: C30.1 C31.1 C32.1 C33.1 C34.1 C35.1 C36.1 C37.1 C38.1 C39.1 C40.1 FB1.2 U1.3 U1.14 U1.19 U1.30 U1.36 U1.41 U1.114 U1.119 U1.124 | length 5749.7
  Top Layer w8: C34.1@2276.5,745 2320,745 2435,860 2435,940 2472.4,977.4 U1.30@2541.85,977.4 2648.15,977.4 ; C35.1@2276.5,1105 2322.13,1150.63 U1.19@2541.85,1150.63 2645.63,1150.63 v1(2675,1180) ; C36.1@2276.5,1245 2315,1245 2330.63,1229.37 U1.14@2541.85,1229.37 2649.37,1229.37 2675,1255 ; C37.1@2276.5,1605 2310,1605 2421.5,1493.5 2421.5,1460 2478.9,1402.6 U1.3@2541.85,1402.6 2627.4,1402.6 2663.9,1366.1 ; C38.1@2535,1758.5 2535,1695 2663.9,1566.1 U1.124@2663.9,1493.15 2663.9,1366.1 ; C33.1@2575,621.5 2575,665 2648.15,738.15 U1.36@2648.15,886.85 2648.15,977.4 ; C39.1@2710,1758.5 2710,1715 2742.64,1682.36 U1.119@2742.64,1493.15 2742.64,1382.64 2715,1355 ; C32.1@2726.89,623.39 U1.41@2726.89,886.85 2726.89,953.11 v1(2675,1005) 2648.15,978.15 2648.15,977.4 ; C40.1@2850,1758.5 2850,1715 2821.38,1686.38 U1.114@2821.38,1493.15 2821.38,1381.38 2795,1355 2715,1355 ; 2663.9,1366.1 v1(2675,1355) 2715,1355
  Top Layer w20: v1(2675,1005) v1(2675,1180) 2675,1255 v1(2675,1355)
  Bottom Layer w20: v1(2675,1005) v1(2675,1180) v1(2675,1355) 2930,1355 2965,1390 2965,1570 3040,1645 3140,1645 3161.5,1666.5 C30.1@3161.5,1695 C31.1@3161.5,1780 FB1.2@3161.5,1865
AVDDL2V5: C44.1 C45.1 C46.1 C47.1 C48.1 C49.1 C50.1 C51.1 FB3.2 U1.10 U1.22 U1.33 U1.44 U1.111 U1.122 U1.128 | length 4493.8
  Top Layer w8: C47.1@2276.5,995 2285,995 2393.39,1103.39 U1.22@2541.85,1103.39 2593.39,1103.39 v2(2615,1125) ; C48.1@2276.5,1420 2404.13,1292.36 U1.10@2541.85,1292.36 2582.36,1292.36 v2(2615,1325) ; C49.1@2276.5,1715 2325,1715 v2(2550,1490) 2553.15,1493.15 U1.128@2600.91,1493.15 ; C46.1@2450,621.5 2450,690 2600.91,840.91 U1.33@2600.91,886.85 2600.91,930.91 v2(2620,950) ; C50.1@2600,1758.5 2600,1720 2695.39,1624.61 U1.122@2695.39,1493.15 v2(2695.39,1425.39) ; v2(2750,970) 2750,950 2774.13,925.87 U1.44@2774.13,886.85 2774.13,725.87 2835,665 C45.1@2835,621.5 ; v2(2870,1425) 2868.62,1426.38 U1.111@2868.62,1493.15 2869.35,1493.88 2869.35,1615.57 2960,1706.21 C51.1@2960,1758.5
  Bottom Layer w8: v2(2550,1490) 2615,1425 ; v2(2620,950) 2640,970 ; v2(2750,970) 2780,1000 2885,1000 3085,800 3240,800 3261.5,778.5 C44.1@3261.5,725 FB3.2@3261.5,615
  Bottom Layer w12: v2(2750,970) 2640,970 2640,1100 v2(2615,1125) 2640,1150 2640,1300 v2(2615,1325) 2615,1425 v2(2870,1425)
DVDDL1V2: C52.1 C53.1 C54.1 C55.1 C56.1 C57.1 C58.1 C59.1 C60.1 C61.1 FB4.2 U1.11 U1.23 U1.45 U1.56 U1.74 U1.87 U1.104 U1.110 | length 6448.4
  Top Layer w8: C58.1@2276.5,930 2315,968.5 2315,995 2407.64,1087.64 U1.23@2541.85,1087.64 v2(2612.36,1087.64) ; C59.1@2276.5,1355 2320,1355 2398.39,1276.61 U1.11@2541.85,1276.61 v2(2613.39,1276.61) ; C57.1@2900,621.5 2789.88,731.61 U1.45@2789.88,886.85 2789.88,954.88 v2(2790,955) 2970,955 ; v1(3015,1000) 2970,955 ; 3015,1050 3052.64,1087.64 U1.74@3148.15,1087.64 3342.36,1087.64 3360,1070 C55.1@3413.5,1070 ; 3015,1250 3057.36,1292.36 U1.87@3148.15,1292.36 C54.1@3413.5,1292.36 ; v1(3015,1350) 2978.86,1386.14 ; C60.1@3025,1758.5 3025,1750 2884.37,1609.37 U1.110@2884.37,1493.15 2884.37,1450.63 v2(2915,1420) 2945,1420 2978.86,1386.14 ; C56.1@3035,621.5 3035,670 2963.11,741.89 U1.56@2963.11,886.85 2963.11,948.11 2970,955 ; C61.1@3135,1758.5 3135,1706.14 2978.86,1550 U1.104@2978.86,1493.15 2978.86,1386.14
  Top Layer w20: v1(3015,1000) 3015,1050 3015,1250 v1(3015,1350)
  Bottom Layer w8: v2(2612.36,1087.64) 2545,1020.28 2545,945 2600,890 2725,890 v2(2790,955) ; v2(2613.39,1276.61) 2500,1390 2500,1490 2545,1535 2800,1535 v2(2915,1420)
  Bottom Layer w20: v1(3015,1000) v1(3015,1350) 3015,1550 3065,1600 3185,1600 3225,1640 3225,1886.5 FB4.2@3161.5,1950 C52.1@3161.5,2035 C53.1@3161.5,2120
  other v1: 3015,1175
EARTH_ETH: C12.1 C13.1 C14.2 C23.1 C24.1 C29.1 | length 3907.9
  Bottom Layer w20: C23.1@1756.5,465 v1(1756.5,606.5) ; C13.1@1756.5,1290 1756.5,1563.5 v1(1675,1645) 1756.5,1726.5 C14.2@1756.5,2005 ; C12.1@1756.5,2115 1800,2158.5 v1(1800,2200) 1975,2375 3165,2375 3536.5,2003.5 v1(4231.5,2003.5) C29.1@4231.5,2115 ; v1(4231.5,353.5) C24.1@4231.5,465